# EAGLE board E-meter3 (EAGLE 7.4.0)
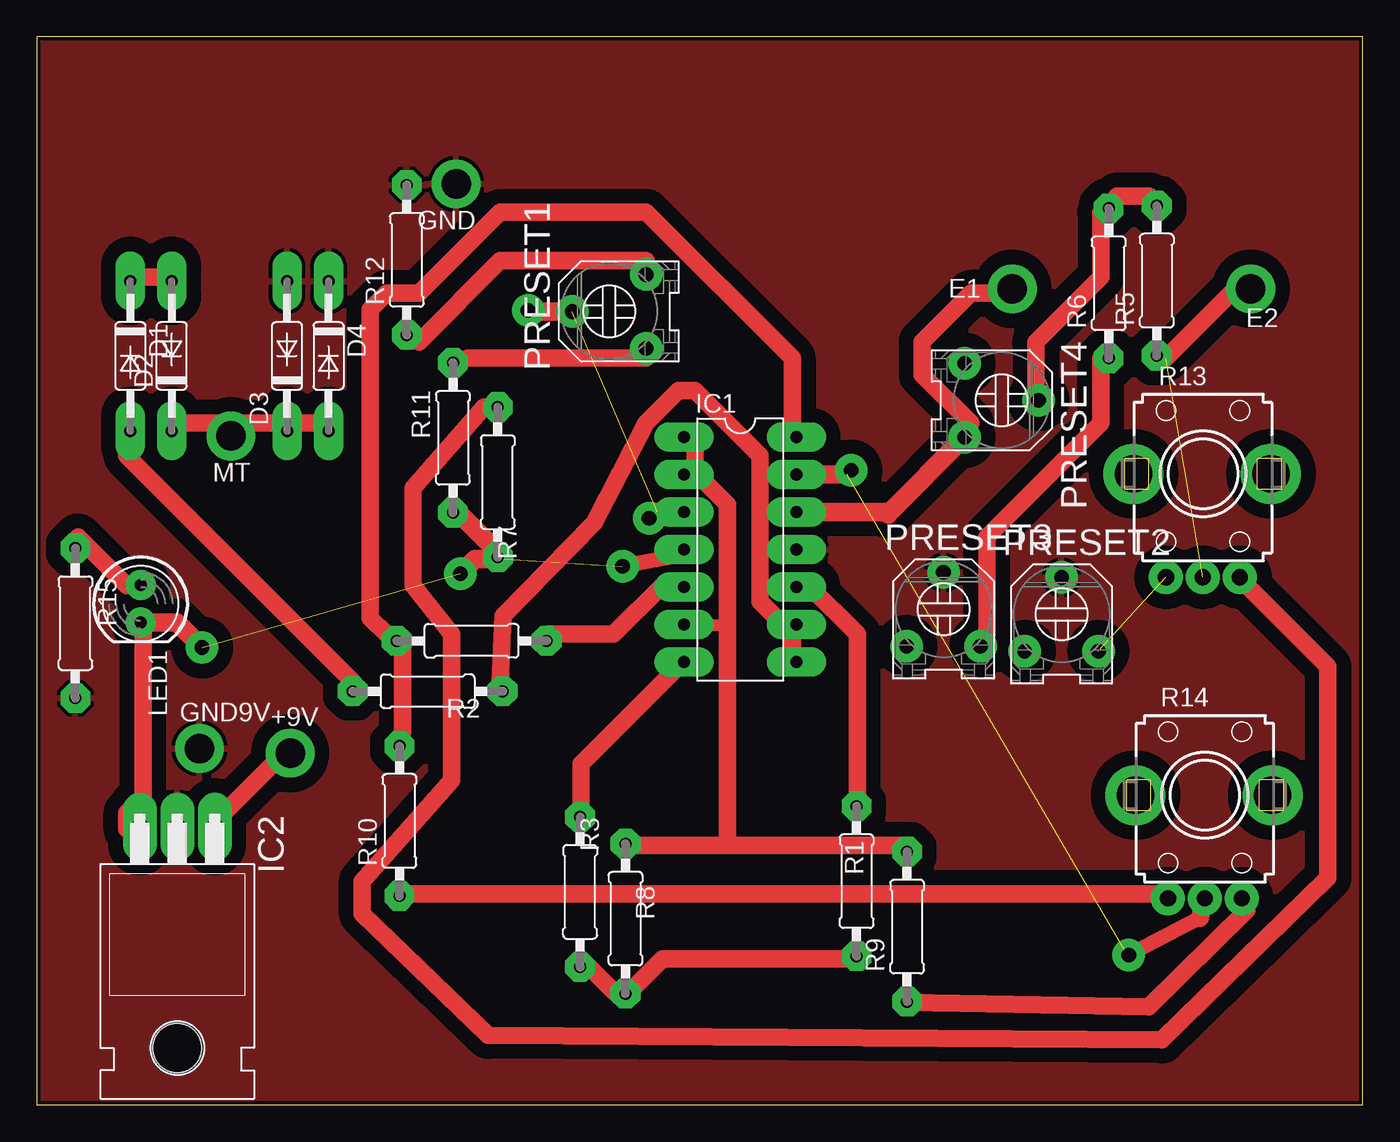
[diagram p0: board, top side]

Size 89.84 x 72.38 mm. Coordinates in mm from the lower left corner, seen from the top.
Outline: 0,0 89.84,0 89.84,72.38 0,72.38 0,0
Copper layers (1*16): Top 0.035mm / dielectric 1.5mm / Bottom 0.035mm
Design rules "hobby *": minimum track width 1.2mm, minimum drill 1.2mm, track to track 1mm, track to pad 0.8mm, pad to pad 0.45mm, via to via 0.8mm, smd to smd 8mil, copper to edge 10mil, drill to drill 12mil, minimum pad ring 0.6mm, minimum via ring 0.6mm, stop-mask expansion 0mil, vias tented up to drill 0mil, thermal gap 10mil

## Footprints (pad centres in the part's own frame; a part is rotated, then mirrored left to right if it is on the bottom)
1X01_2MM = drill 2 pad 3.302: 1 0,0
DO35-10 = drill 0.813 long: A 5.08,0; C -5.08,0
DIL14 = drill 0.813 long: 1 -7.62,-3.81; 2 -5.08,-3.81; 3 -2.54,-3.81; 4 0,-3.81; 5 2.54,-3.81; 6 5.08,-3.81; 7 7.62,-3.81; 8 7.62,3.81; 9 5.08,3.81; 10 2.54,3.81; 11 0,3.81; 12 -2.54,3.81; 13 -5.08,3.81; 14 -7.62,3.81
TO220H = drill 1.118 long: 1 -2.54,-10.16; 2 0,-10.16; 3 2.54,-10.16 | hole 3.302: 0,4.826
LED5MM = drill 0.813 pad 1.88: A -1.27,0; K 1.27,0
TRIMMER_3306F = drill 1: 1 -2.5,-2.5; 2 0,2.5; 3 2.5,-2.5
0207/10 = drill 0.813 octagon: 1 -5.08,0; 2 5.08,0
POT_EVUF = drill 1.1 pad 1.93: 1 -2.5,-7; 2 0,-7; 3 2.5,-7 | drill 2.54 pad 3.81: M1 4.6,0; M2 -4.7,0

## Placement (x,y rotation side)
+9V  M01PTH_2MM  [1X01_2MM]  17.17,23.84 0 top
D1  1N4148DO35-10  [DO35-10]  6.33,50.76 270 top
D2  1N4148DO35-10  [DO35-10]  9.14,50.76 90 top
D3  1N4148DO35-10  [DO35-10]  16.95,50.76 90 top
D4  1N4148DO35-10  [DO35-10]  19.76,50.76 270 top
E1  M01PTH_2MM  [1X01_2MM]  66.1,55.3 180 top
E2  M01PTH_2MM  [1X01_2MM]  82.26,55.3 180 top
GND  M01PTH_2MM  [1X01_2MM]  28.41,62.42 180 top
GND9V  M01PTH_2MM  [1X01_2MM]  11.01,24.15 0 top
IC1  LM324N  [DIL14]  47.66,37.63 270 top
IC2  7805T  [TO220H]  9.51,8.68 180 top
LED1  [LED5MM]  7.03,33.96 270 top
MT  M01PTH_2MM  [1X01_2MM]  13.14,45.33 180 top
PRESET1  [TRIMMER_3306F]  38.78,53.77 90 top
PRESET2  [TRIMMER_3306F]  69.44,33.25 0 top
PRESET3  [TRIMMER_3306F]  61.44,33.59 0 top
PRESET4  [TRIMMER_3306F]  65.37,47.75 270 top
R1  [0207/10]  55.55,15.16 90 top
R2  [0207/10]  26.48,28.03 180 top
R3  [0207/10]  36.81,14.43 270 top
R4  [0207/10]  29.46,31.45 0 top
R5  [0207/10]  75.89,55.86 90 top
R6  [0207/10]  72.63,55.68 90 top
R7  [0207/10]  31.23,42.21 270 top
R8  [0207/10]  39.89,12.62 90 top
R9  [0207/10]  58.97,12.08 90 top
R10  [0207/10]  24.57,19.24 90 top
R11  [0207/10]  28.19,45.21 90 top
R12  [0207/10]  25.07,57.26 90 top
R13  POT_US-EVUF2A  [POT_EVUF]  79.02,42.76 0 top
R14  POT_US-EVUF2A  [POT_EVUF]  79.15,20.99 0 top
R15  [0207/10]  2.61,32.65 270 top

## Library data of the parts
+9V E1 E2 GND GND9V MT = SparkFun-Connectors
D1-D4 = diode
IC1 IC2 = linear
LED1 = SparkFun-LED
PRESET1-PRESET4 = dp_devices
R1-R12 R15 = rcl
R13 R14 = 4009dist_PWM3_v1

## Nets
+9V: +9V.1 IC2.1
GND: D3.A D4.C GND9V.1 GND.1 IC1.11 IC2.2 PRESET2.2 PRESET3.2 R12.2 R15.2
N$1: E2.1 R5.1 R13.2
N$2: IC1.10 R1.2
N$3: IC1.7 R3.1
N$4: IC1.1 IC1.2 IC1.6 R8.2 R9.2
N$5: IC1.5 R4.2
N$6: IC1.14 R4.1 R10.2
N$7: IC1.8 IC1.9 R2.1
N$8: D1.A R2.2
N$9: E1.1 IC1.12 PRESET4.3
N$10: D1.C D2.A
N$11: D2.C D3.C D4.A MT.1
N$12: IC1.3 PRESET1.2
N$13: PRESET1.1 R11.2
N$14: IC1.4 IC2.3 LED1.K R7.2 R11.1
N$15: R7.1 R13.3
N$16: PRESET1.3 R12.1
N$17: R10.1 R14.1
N$19: PRESET2.3 R13.1
N$20: IC1.13 R14.2
N$21: R9.1 R14.3
N$22: R1.1 R3.2 R8.1
N$23: PRESET4.2 R5.2 R6.2
N$24: PRESET3.3 R6.1
N$26: LED1.A R15.1

## Tracks (layer width: path | path; a pad name or v marks a point on that pad's centre or on a via)
+9V
  Top 1.2: IC2.1 12.69,19.8 17.09,24.2 +9V.1
GND
  pour Top: 0.19,72.5 0.19,0 89.69,0 89.69,0.5 89.69,72.5
N$1  (1 unrouted)
  Top 1.2: R5.1 76.49,50.6 81.99,56.1 E2.1
N$2
  Top 1.2: IC1.10 52.29,35.2 55.59,31.9 55.59,20.9 R1.2
N$3
  Top 1.2: R3.1 36.89,19.8 36.89,23.1 43.49,29.7 IC1.7
N$4
  Top 0.813: 46.79,40.7 46.79,32.6 46.69,32.5 43.9,32.5 IC1.6
  Top 1.2: 44.59,42.9 44.59,45.1 IC1.1 | 46.79,17.6 58.89,17.6 R9.2 | 46.79,17.6 40.19,17.6 R8.2 | 44.59,42.9 46.79,40.7 46.79,17.6 | 44.59,42.9 IC1.2
N$5
  Top 1.2: R4.2 34.69,31.9 39.09,31.9 42.39,35.2 43.49,35.2 IC1.5
N$6
  Top 1.2: R10.2 24.79,25.3 24.79,30.8 R4.1 23.69,31.9 22.59,33 22.59,53.9 23.69,55 25.89,55 31.39,60.5 41.29,60.5 51.19,50.6 51.19,46.2 IC1.14
N$7
  Top 1.2: 51.19,31.9 48.99,34.1 48.99,44 44.59,48.4 43.49,48.4 41.29,46.2 37.74,39.45 31.59,33.15 31.39,28.6 R2.1 | 51.19,31.9 51.19,30.8 IC1.8 | 51.19,31.9 IC1.9
N$8
  Top 1.2: R2.2 21.49,28.6 6.09,44 6.09,45.1 D1.A
N$9
  Top 1.2: PRESET4.3 63.29,46.2 59.99,49.5 59.99,51.7 63.29,55 65.49,55 E1.1
  Top 1.27: IC1.12 57.52,40.17 57.69,40 57.69,40.07 PRESET4.3
N$10
  Top 1.2: D1.C 7.19,56.1 8.29,56.1 D2.A
N$11
  Top 1.2: 17.09,46.2 19.29,46.2 D4.A | D2.C 9.39,46.2 12.69,46.2 MT.1 13.79,46.2 17.09,46.2 | 17.09,46.2 D3.C
N$12  (1 unrouted)
  Top 1.27: PRESET1.2 33.46,53.77 33.39,53.7 | IC1.3 42.06,40.17 41.54,39.65
N$13
  Top 1.2: R11.2 29.19,50.6 41.29,50.6 PRESET1.1
N$14  (2 unrouted)
  Top 0.813: IC1.4 43.82,37.63 43.69,37.5 | 43.69,37.5 43.69,38 44.19,37.5 43.69,37.5 | R7.2 31.23,37.04 31.19,37 31.19,36.5 31.69,37
  Top 1.016: 43.89,37.3 39.64,36.5
  Top 1.2: R7.2 31.39,37.4 28.09,40.7 R11.1 | LED1.K 7.19,31.9 7.19,20.9 6.09,19.8 6.09,18.7 IC2.3
  Top 1.27: LED1.K 9.5,32.69 11.19,31 | R11.1 28.56,40.13 31.69,37 31.19,37 29.69,37 28.69,36 | 43.69,37.5 43.89,37.3
N$15
  Top 1.2: R7.1 30.29,47.3 25.49,41.8 25.49,35.2 28.09,31.9 28.09,22 22.04,15.15 22.04,12.95 30.59,4.7 76.24,4.4 87.49,15.4 87.49,29.7 81.99,35.2 R13.3
N$16
  Top 1.2: R12.1 25.89,51.7 31.39,57.2 41.29,57.2 PRESET1.3
N$17
  Top 1.2: R10.1 24.79,14.3 76.49,14.3 R14.1
N$19  (1 unrouted)
N$20  (1 unrouted)
  Top 1.016: 78.8,12.66 73.64,9.95
  Top 1.27: IC1.13 54.9,42.71 55.19,43 | R14.2 78.8,12.66 | 73.64,9.95 74.19,10 73.69,10.5
N$21
  Top 1.2: R9.1 58.89,6.95 75.34,6.65 81.99,13.2 R14.3
N$22
  Top 1.2: R3.2 36.89,9.9 39.09,7.7 R8.1 40.19,7.7 42.39,9.9 55.59,9.9 R1.1
N$23
  Top 1.2: R5.2 75.39,61.6 73.19,61.6 R6.2 72.09,60.5 72.09,56.1 67.69,51.7 67.69,48.4 PRESET4.2
N$24
  Top 1.2: R6.1 72.09,50.6 72.09,46.2 64.39,38.5 64.39,31.9 PRESET3.3
N$26
  Top 1.2: LED1.A 6.09,35.2 2.79,38.5 R15.1
S$2  (via drill 1 pad 1.02)
  other vias: 28.69,36
S$3  (via drill 1 pad 1.02)
  other vias: 11.19,31
S$4  (via drill 1 pad 1.02)
  other vias: 55.19,43
S$5  (via drill 1 pad 1.02)
  other vias: 73.99,10.15
S$6  (via drill 1 pad 1.02)
  other vias: 39.69,36.5
S$7  (via drill 1 pad 1.02)
  other vias: 33.29,53.85
S$8  (via drill 1 pad 1.02)
  other vias: 41.49,39.75